# Altium PCB PCB_NodeQuadPCB_2022-04-19.pcbdoc
Units mm, origin at the board's own origin, x right, y up, seen from the top; angles counter-clockwise.
Board outline 99.75 x 100.1 mm, 2 copper layers (Top Layer, Bottom Layer); 20 components, 51 nets, 186 pads, 3 vias.
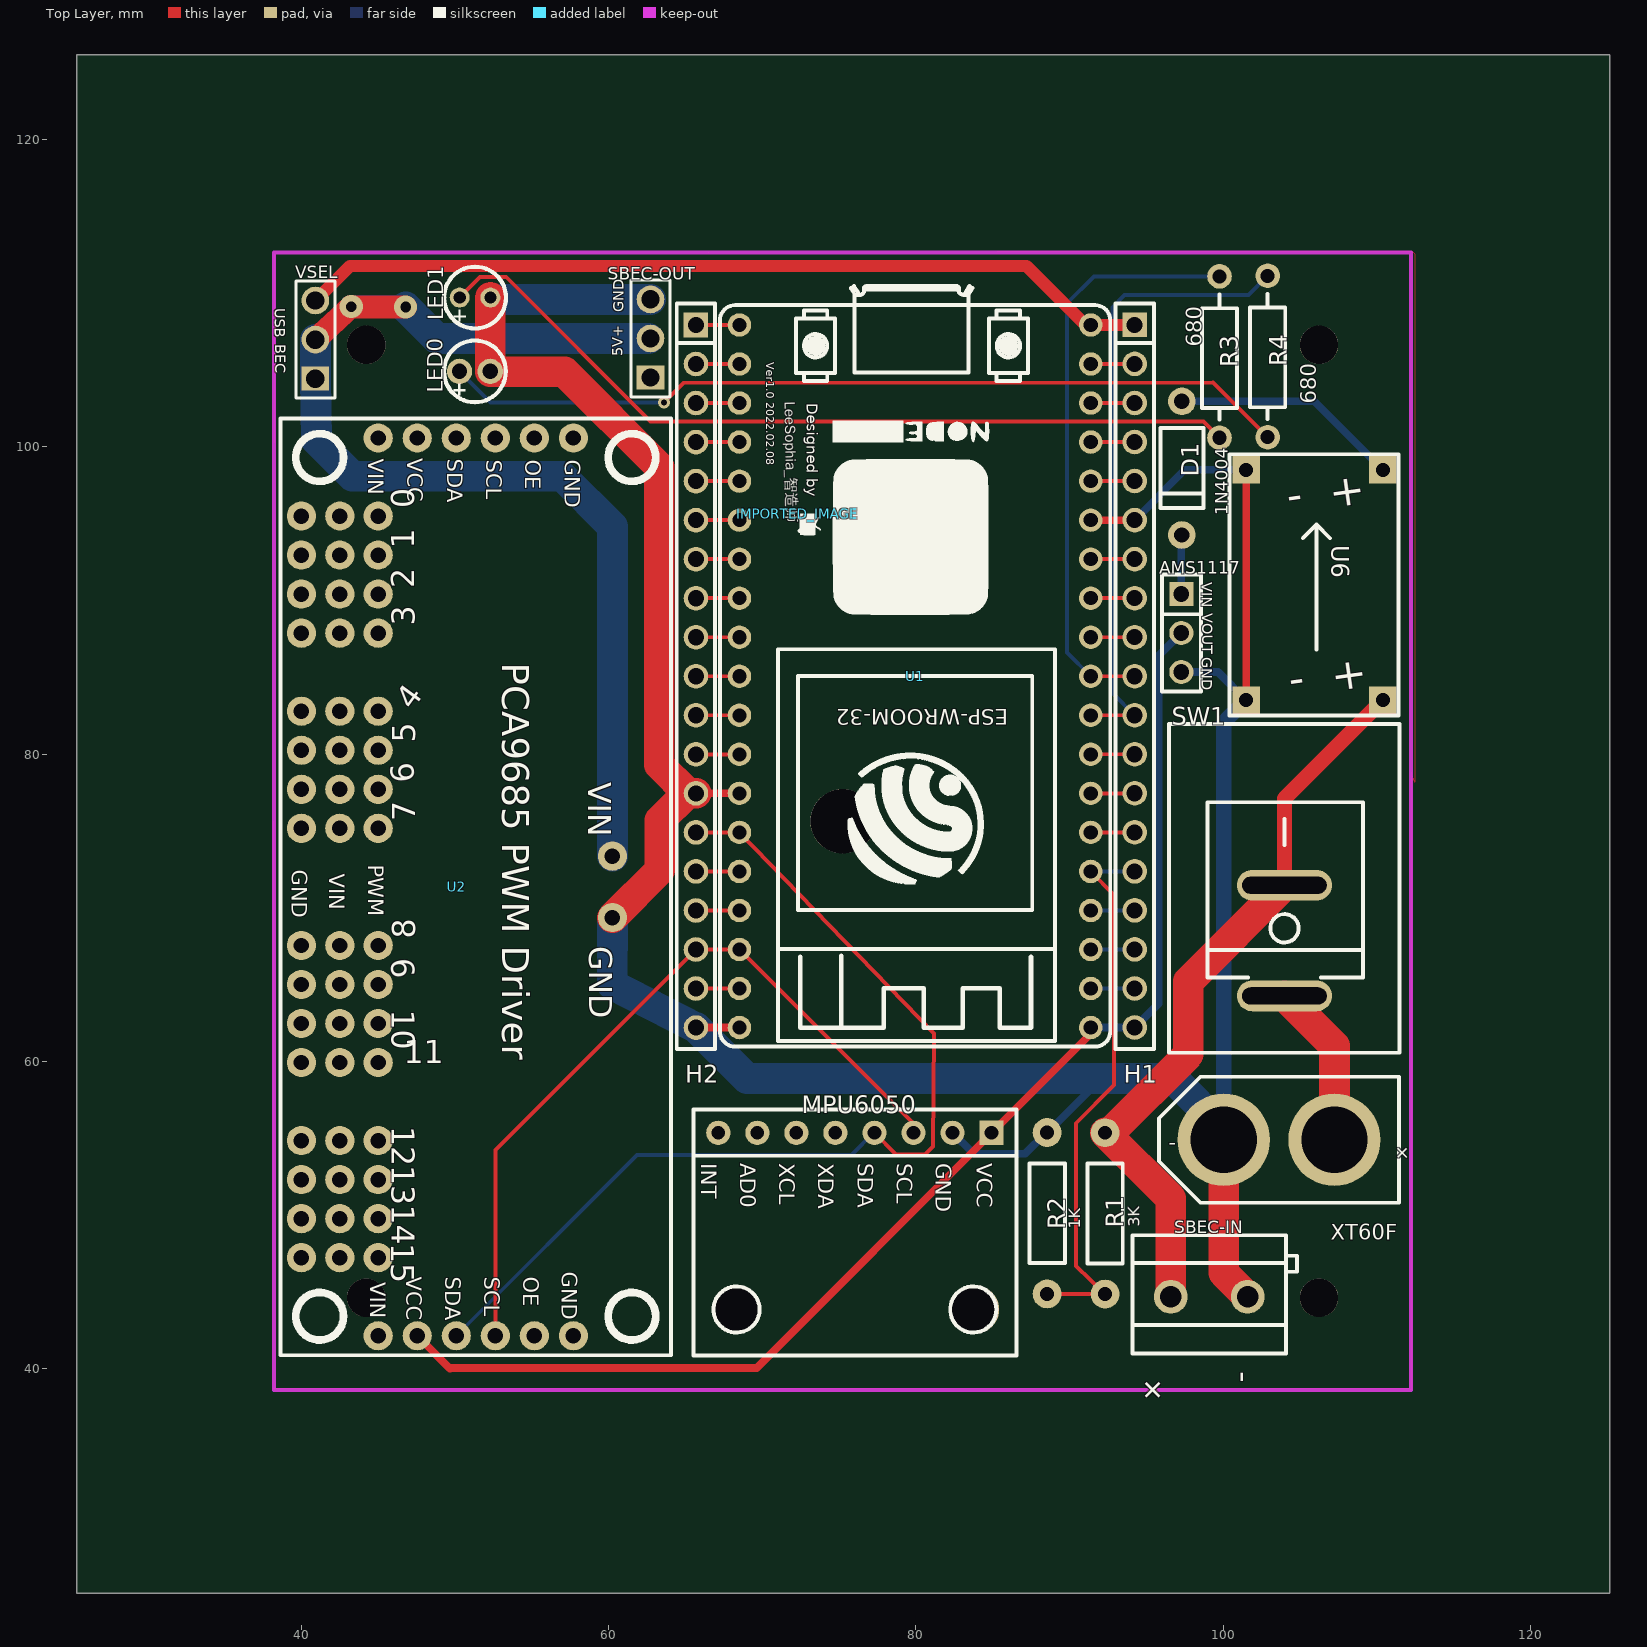
[diagram p0: Top Layer view]
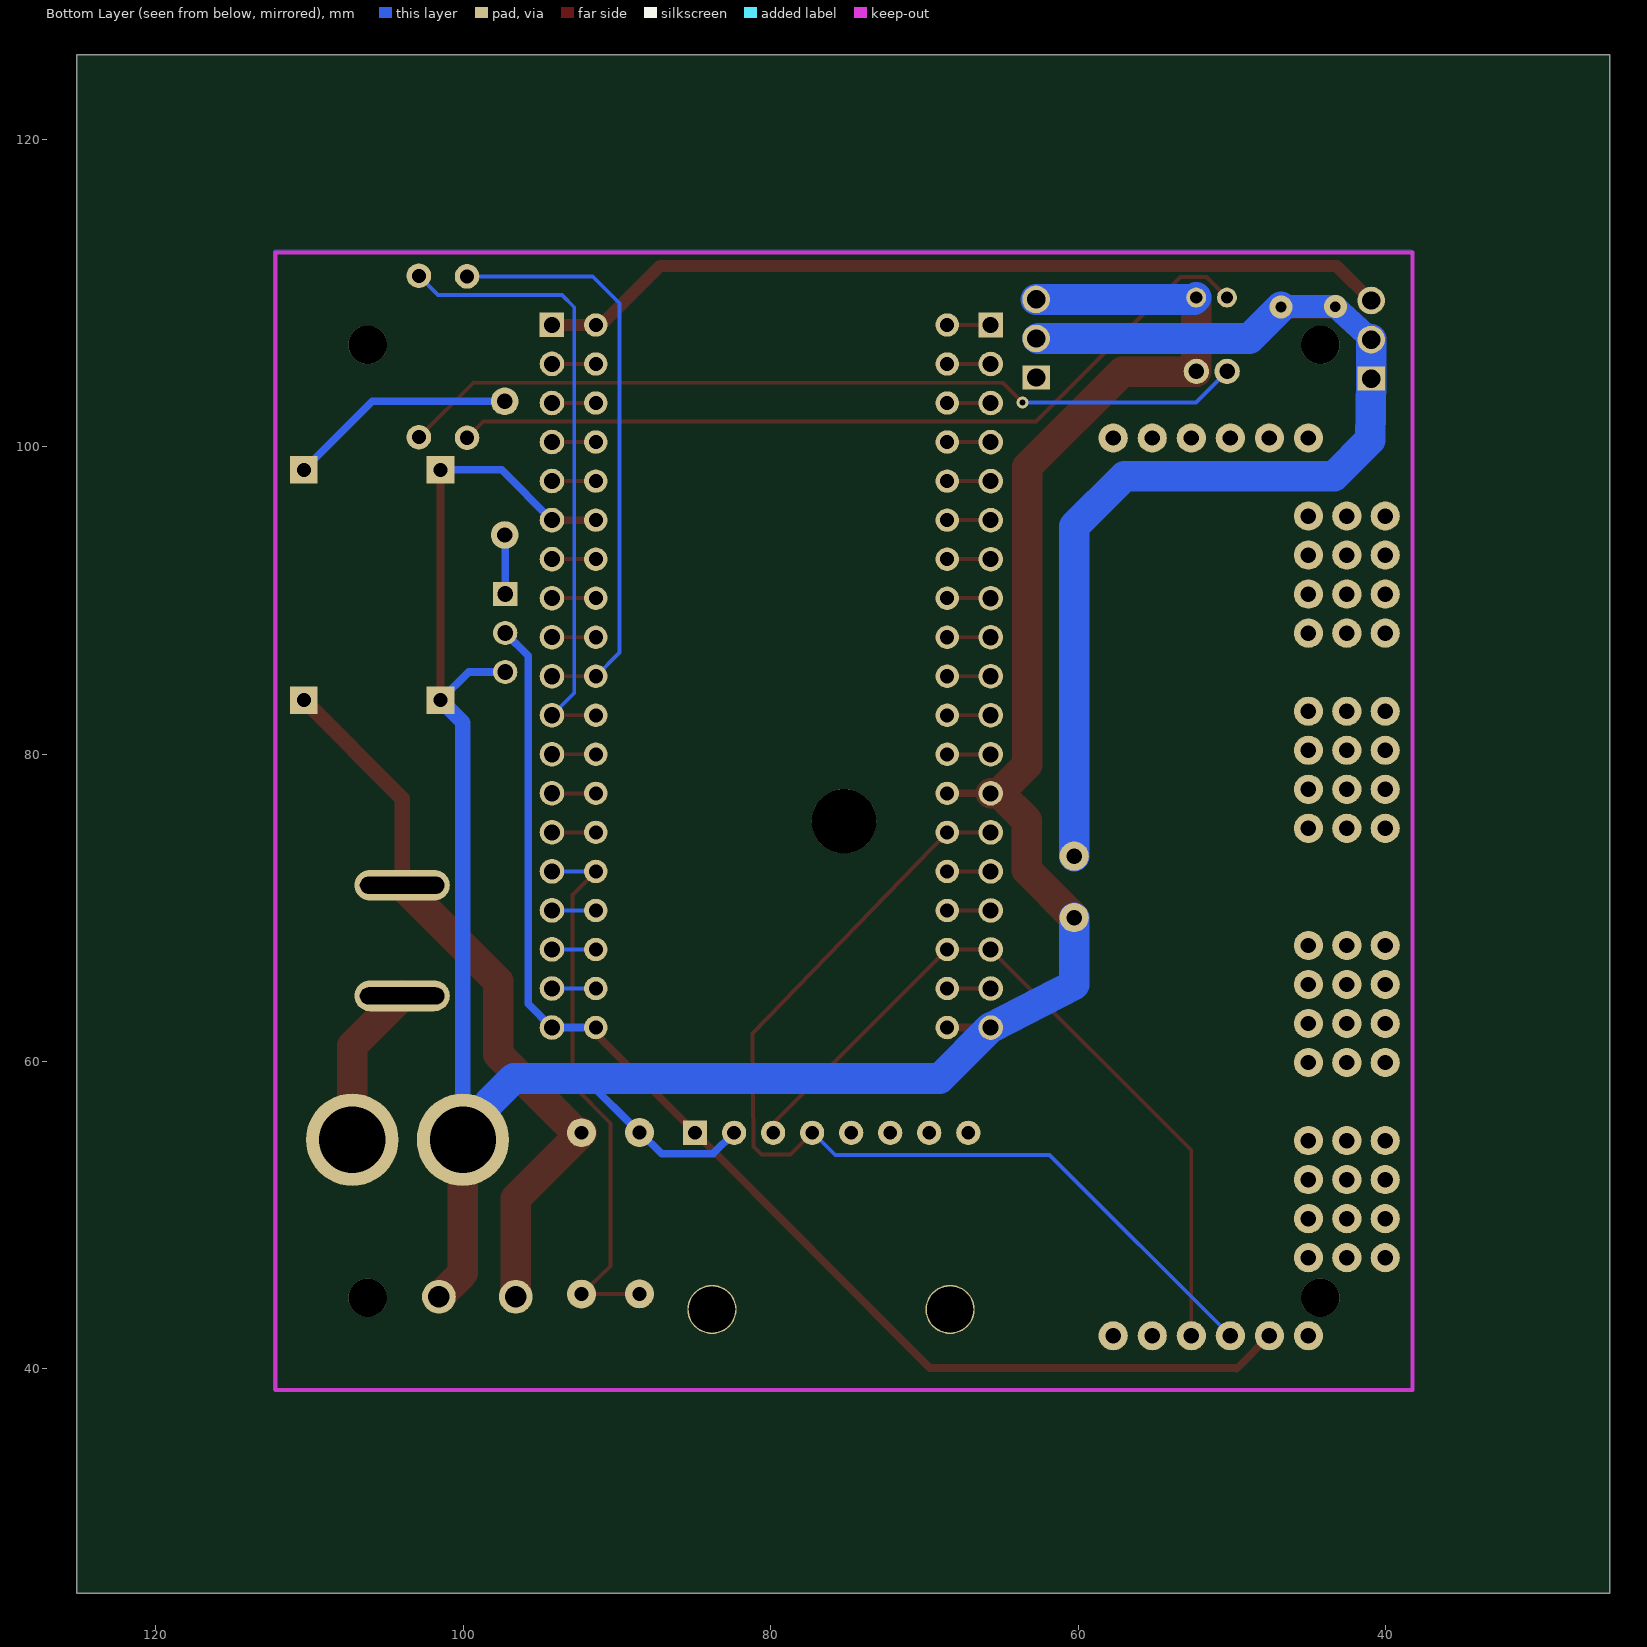
[diagram p1: Bottom Layer view, seen from below]

## Layer stack, top to bottom
Top Layer: signal copper (thickness not stored)
Dielectric: dielectric 0.32, FR-4, Dk 4.8
Bottom Layer: signal copper (thickness not stored)

## Board outline
125.145,25.4 25.4,25.4 25.4,125.497 125.145,125.497

## Components (designator, comment, footprint, x,y, rotation, side; value= is the part's Value field where it differs from the comment)
AMS1117 "Header-Female-2.54_1x3" HDR-TH_3P-P2.54-V-F 97.274,87.878 r270 top
D1 "1N4004_C360241" DO-41_BD2.4-L4.7-P8.70-D0.9-RD 97.304,98.606 r90 top
H1 "2.54-1*19P母" HDR-TH_19P-P2.54-V-F 94.231,85.066 r270 top
H2 "2.54-1*19P母" HDR-TH_19P-P2.54-V-F 65.684,85.062 r270 top
IMPORTED_IMAGE "IMPORTED_IMAGE" IMPORTED_IMAGE 72.316,95.653 r0 top
LED0 "LED-DIP-3MM_RED" LED-TH_BD4.1-P2.00-D0.5-RD_RED 51.299,104.901 r180 top
LED1 "LED-DIP-3MM_GREEN" LED-TH_BD4.1-P2.00-D0.6-RD_GREEN 51.309,109.704 r180 top
MPU6050 "MPU6050模块-排母" MPU6050模块-排母-PCB 75.817,48.048 r270 top
R1 "3kΩ" RES-TH_BD2.3-L6.5-P10.50-D0.5 92.31,50.109 r90 top
R2 "1kΩ" RES-TH_BD2.3-L6.5-P10.50-D0.5 88.537,50.119 r90 top
R3 "680" RES-TH_BD2.2-L6.5-P10.50-D0.6 99.756,105.831 r270 top
R4 "680" RES-TH_BD2.2-L6.5-P10.50-D0.6 102.888,105.871 r270 top
SBEC-IN "KF301-5.0-2P" CONN-TH_P5.00_KF301-5.0-2P 99.085,44.685 r0 top
SBEC-OUT "210S-1*3P L=11.6MMGold-plated black" HDR-TH_3P-P2.54-V-M-1 62.728,107.042 r90 top
SW1 "CN-KCD1-101-2P" SW-TH_CN-KCD3-2P 103.979,67.863 r90 top
U1 "Ai-Thinker_NodeMCU-32SLUA" AI-THINKER_NODEMCU-32SLUA 79.945,85.062 r180 top
U2 "PCA9685自改16路舵机 COPY" PCA9685 50.088,72.626 r270 top
U6 "MINI360 DCDC" MINI360 111.394,99.507 r270 top
VSEL "210S-1*3P L=11.6MMGold-plated black" HDR-TH_3P-P2.54-V-M-1 40.921,106.972 r90 top
XT60F "XT60-F" XT60PB-F 103.629,54.903 r90 top

## Footprints (in the part's own frame and the unit in brackets; to place one, negate y for a bottom-side part, rotate by r counter-clockwise, add the part's x,y. Pads: shape width x height; smd on the part's side, far side on the other; paste and mask are expansions set on the pad)
AI-THINKER_NODEMCU-32SLUA [mil]
  round 60 hole 36: 1(-450,-900) 2(-450,-800) 3(-450,-700) 4(-450,-600) 5(-450,-500) 6(-450,-400) 7(-450,-300) 8(-450,-200) 9(-450,-100) 10(-450,0) 11(-450,100) 12(-450,200) 13(-450,300) 14(-450,400) 15(-450,500) 16(-450,600) 17(-450,700) 18(-450,800) 19(-450,900) 20(450,-900) 21(450,-800) 22(450,-700) 23(450,-600) 24(450,-500) 25(450,-400) 26(450,-300) 27(450,-200) 28(450,-100) 29(450,0) 30(450,100) 31(450,200) 32(450,300) 33(450,400) 34(450,500) 35(450,600) 36(450,700) 37(450,800) 38(450,900)
  silkscreen extent -500,-999 500,949
CONN-TH_P5.00_KF301-5.0-2P [mm]
  round 2.2 hole 1.4: 1(-2.5,0) 2(2.5,0)
  silkscreen extent -5,-3.7 5.71,4
DO-41_BD2.4-L4.7-P8.70-D0.9-RD [mm]
  round 1.8 hole 1: 1(-4.35,0) 2(4.35,0)
  silkscreen extent -2.6,-1.4 2.6,1.4
HDR-TH_3P-P2.54-V-F [mil]
  rect 62x62 hole 40.16: 1(-100,0)
  round 62 hole 40.16: 2(0,0) 3(100,0)
  silkscreen extent -150,-50 150,50
HDR-TH_3P-P2.54-V-M-1 [mm]
  rect 1.575x1.8 hole 1.2: 1(-2.54,0)
  round 1.8 hole 1.2: 2(0,0) 3(2.54,0)
  silkscreen extent -3.81,-1.27 3.81,1.27
HDR-TH_19P-P2.54-V-F [mm]
  rect 1.6x1.6 hole 1.05: 1(-22.86,0)
  round 1.6 hole 1.05: 2(-20.32,0) 3(-17.78,0) 4(-15.24,0) 5(-12.7,0) 6(-10.16,0) 7(-7.62,0) 8(-5.08,0) 9(-2.54,0) 10(0,0) 11(2.54,0) 12(5.08,0) 13(7.62,0) 14(10.16,0) 15(12.7,0) 16(15.24,0) 17(17.78,0) 18(20.32,0) 19(22.86,0)
  silkscreen extent -24.25,-1.25 24.25,1.25
IMPORTED_IMAGE [mm]
  silkscreen extent 0,-1.4 1.5,0
LED-TH_BD4.1-P2.00-D0.5-RD_RED [mm]
  round 1.65 hole 1: 1(-1,0) 2(1,0)
  silkscreen extent -2.05,-2.05 2.05,2.05
LED-TH_BD4.1-P2.00-D0.6-RD_GREEN [mm]
  round 1.3 hole 0.8: 1(-1,0) 2(1,0)
  silkscreen extent -2.05,-2.05 2.05,2.05
MINI360 [mil]
  rect 70.87x70.87 hole 36: 1(40,-40) 2(40,-390) 3(630,-40) 4(630,-390)
  silkscreen extent 0,-433 669,0
MPU6050模块-排母-PCB [mil]
  round 125.98 hole 118.11 slot 118.31 at 90 deg: 0(165,315)
  round 125.98 hole 118.11 slot 118.31 at 0 deg: 0(165,-295)
  rect 62x62 hole 35: 1(-287.76,358.36)
  round 62 hole 35: 2(-287.76,258.36) 3(-287.76,158.36) 4(-287.76,58.36) 5(-287.76,-41.64) 6(-287.76,-141.64) 7(-287.76,-241.64) 8(-287.76,-341.64)
  silkscreen extent -347,-405 283,422
PCA9685 [mm]
  round 1.9 hole 1: 1(-22.86,-7.58) 1(-20.32,-7.58) 1(-17.78,-7.58) 1(-15.24,-7.58) 1(-10.16,-7.58) 1(-7.62,-7.58) 1(-5.08,-7.58) 1(-2.54,-7.58) 1(5.08,-7.58) 1(7.62,-7.58) 1(10.16,-7.58) 1(12.7,-7.58) 1(17.78,-7.58) 1(20.32,-7.58) 1(22.86,-7.58) 1(25.4,-7.58) GND(-22.86,-10.08) GND(-20.32,-10.08) GND(-17.78,-10.08) GND(-15.24,-10.08) GND(-10.16,-10.08) GND(-7.62,-10.08) GND(-5.08,-10.08) GND(-2.54,-10.08) GND(5.08,-10.08) GND(7.62,-10.08) GND(10.16,-10.08) GND(12.7,-10.08) GND(17.78,-10.08) GND(20.32,-10.08) GND(22.86,-10.08) GND(25.4,-10.08) GND-IN(-27.94,7.62) GND-OUT(30.48,7.62) GND-TOT(3.27,10.16) OE-IN(-27.94,5.08) OE-OUT(30.48,5.08) PWM01(-22.86,-5.08) PWM02(-20.32,-5.08) PWM03(-17.78,-5.08) PWM04(-15.24,-5.08) PWM05(-10.16,-5.08) PWM06(-7.62,-5.08) PWM07(-5.08,-5.08) PWM08(-2.54,-5.08) PWM09(5.08,-5.08) PWM10(7.62,-5.08) PWM11(10.16,-5.08) PWM12(12.7,-5.08) PWM13(17.78,-5.08) PWM14(20.32,-5.08) PWM15(22.86,-5.08) PWM16(25.4,-5.08) SCL-IN(-27.94,2.54) SCL-OUT(30.48,2.54) SDA-IN(-27.94,0) SDA-OUT(30.48,0) VCC-IN(-27.94,-2.54) VCC-OUT(30.48,-2.54) VIN-IN(-27.94,-5.08) VIN-OUT(30.48,-5.08) VIN-TOT(-0.73,10.16)
  silkscreen extent -29.21,-11.43 31.75,13.97
RES-TH_BD2.2-L6.5-P10.50-D0.6 [mm]
  round 1.6 hole 0.914: 1(-5.25,0) 2(5.25,0)
  silkscreen extent -4.06,-1.14 4.06,1.14
RES-TH_BD2.3-L6.5-P10.50-D0.5 [mil]
  round 74 hole 35.4: 1(-206.69,0) 2(206.69,0)
  silkscreen extent -128,-45 128,45
SW-TH_CN-KCD3-2P [mm]
  oval 2x6.2 hole 1.1 slot 5.5 at 90 deg: 1(-3.6,0) 2(3.6,0)
  silkscreen extent -7.3,-7.5 14.1,7.5
XT60PB-F [mm]
  round 6 hole 4.3: 1(0,3.6) 2(0,-3.6)
  silkscreen extent -4.1,-7.8 4.1,7.8

## Free pads (board coordinates)
  round 2.5 hole 2.5 unplated: ""(44.227,44.629) ""(44.227,106.628) ""(106.227,44.629) ""(106.227,106.628)
  round 4.2 hole 4.2 unplated: ""(75.227,75.628)

## Via types
v1: diameter 1.5, hole 0.7, Top Layer to Bottom Layer, tented both sides, 2 vias
v2: diameter 0.8, hole 0.4, Top Layer to Bottom Layer, tented both sides, 1 vias

## Nets (pads, with @x,y where several pads share a name; then routed paths per layer and width w, separated by ;. In a path a pad name is that pad's centre, name@x,y a point inside that pad or via, vN(x,y) a via of type N, cw(c..) or ccw(c..) an arc to the next point about the centre after c; other vN are vias at no path point)
AMS-VOUT: AMS1117.2 H1.19 MPU6050.1 U1.19 U2.VCC-OUT | length 83.9
  Top Layer w0.5: U2.VCC-OUT 49.682,40.013 49.723,40.051 69.634,40.051 MPU6050.1 91.375,61.812 U1.19
  Bottom Layer w0.5: U1.19 H1.19 ; H1.19 95.783,63.757 95.783,86.387 AMS1117.2
D1_1: AMS1117.1 D1.1 | length 3.9
  Bottom Layer w0.5: AMS1117.1 97.274,94.226 D1.1
D1_2: D1.2 U6.1 | length 14.9
  Bottom Layer w0.5: D1.2 105.913,102.956 U6.1
GND: AMS1117.3 H1.6 H2.13 H2.19 LED0.1 LED1.1 MPU6050.2 R2.2 SBEC-IN.2 SBEC-OUT.3 U1.6 U1.32 U1.38 U2.GND-TOT U6.2 U6.4 XT60F.1 | length 199.2
  Top Layer w0.5: H2.19 U1.38 ; H2.13 U1.32 ; U1.6 H1.6 ; U6.4 U6.2
  Top Layer w2: LED0.1 52.299,109.694 LED1.1 ; LED0.1@52.298,104.902 52.329,104.871 57.124,104.871 63.299,98.697 63.299,79.301 65.158,77.442 H2.13 65.091,77.442 63.328,75.678 63.328,72.436 U2.GND-TOT ; XT60F.1@100.029,55.483 100.029,46.241 SBEC-IN.2
  Bottom Layer w0.5: MPU6050.2 83.754,53.982 87.096,53.982 88.483,55.369 R2.2 92.055,58.885 ; H1.6 97.496,98.491 U6.2 ; AMS1117.3 99.655,85.338 U6.4
  Bottom Layer w1: XT60F.1@100.029,55.483 100.029,82.045 U6.4
  Bottom Layer w2: LED1.1 52.431,109.582 SBEC-OUT.3 ; U2.GND-TOT 60.246,65 H2.19 69,58.886 96.723,58.886 100.029,55.58 XT60F.1@100.029,55.483
R3_2: LED1.2 R3.2 | length 54.3
  Top Layer w0.254: LED1.2 51.641,111.036 53.34,111.036 62.738,101.638 98.699,101.638 R3.2
R4_2: LED0.2 R4.2 | length 55.4
  Top Layer w0.254: v2(63.609,102.88) 64.879,104.15 99.319,104.191 R4.2
  Bottom Layer w0.254: LED0.2 52.32,102.88 v2(63.609,102.88)
S$7: 
S$9: 
S$11: 
S$13: 
S$62: 
S$64: 
S$140: 
S$142: 
SBEC-IN_1: R1.2 SBEC-IN.1 SW1.2 U6.3 | length 48.3
  Top Layer w1: SW1.2 103.979,77.105 U6.3
  Top Layer w2: SBEC-IN.1 96.585,51.084 92.31,55.359 92.626,55.359 97.724,60.457 97.724,65.208 SW1.2
U1_1: H1.1 U1.1 VSEL.3 | length 55.8
  Top Layer w0.8: VSEL.3 43.175,111.765 87.195,111.765 91.041,107.922 U1.1 H1.1
U1_2: H1.2 U1.2 | length 2.9
  Top Layer w0.254: U1.2 H1.2
U1_3: H1.3 U1.3 | length 2.9
  Top Layer w0.254: U1.3 H1.3
U1_4: H1.4 U1.4 | length 2.9
  Top Layer w0.254: U1.4 H1.4
U1_5: H1.5 U1.5 | length 2.9
  Top Layer w0.254: U1.5 H1.5
U1_7: H1.7 U1.7 | length 2.9
  Top Layer w0.254: U1.7 H1.7
U1_8: H1.8 U1.8 | length 2.9
  Top Layer w0.254: U1.8 H1.8
U1_9: H1.9 U1.9 | length 2.9
  Top Layer w0.254: U1.9 H1.9
U1_10: H1.10 R3.1 U1.10 | length 38.4
  Top Layer w0.254: U1.10 H1.10
  Bottom Layer w0.254: U1.10 89.827,86.609 89.827,109.334 91.574,111.082 R3.1
U1_11: H1.11 R4.1 U1.11 | length 41
  Top Layer w0.254: U1.11 H1.11
  Bottom Layer w0.254: H1.11 92.78,83.977 92.78,109.074 93.581,109.874 101.641,109.874 R4.1
U1_12: H1.12 U1.12 | length 2.9
  Top Layer w0.254: U1.12 H1.12
U1_13: H1.13 U1.13 | length 2.9
  Top Layer w0.254: U1.13 H1.13
U1_14: H1.14 U1.14 | length 2.9
  Top Layer w0.254: U1.14 H1.14
U1_15: H1.15 R1.1 R2.1 U1.15 | length 36.4
  Top Layer w0.254: R2.1@88.768,44.869 R1.1 90.409,46.696 90.409,55.974 92.9,58.466 92.9,70.835 U1.15
  Bottom Layer w0.254: U1.15 H1.15
U1_16: H1.16 U1.16 | length 2.9
  Bottom Layer w0.254: U1.16 H1.16
U1_17: H1.17 U1.17 | length 2.9
  Bottom Layer w0.254: U1.17 H1.17
U1_18: H1.18 U1.18 | length 2.9
  Bottom Layer w0.254: U1.18 H1.18
U1_20: H2.1 U1.20 | length 2.8
  Top Layer w0.254: H2.1 U1.20
U1_21: H2.2 U1.21 | length 2.8
  Top Layer w0.254: H2.2 U1.21
U1_22: H2.3 U1.22 | length 2.8
  Top Layer w0.254: H2.3 U1.22
U1_23: H2.4 U1.23 | length 2.8
  Top Layer w0.254: H2.4 U1.23
U1_24: H2.5 U1.24 | length 2.8
  Top Layer w0.254: H2.5 U1.24
U1_25: H2.6 U1.25 | length 2.8
  Top Layer w0.254: H2.6 U1.25
U1_26: H2.7 U1.26 | length 2.8
  Top Layer w0.254: H2.7 U1.26
U1_27: H2.8 U1.27 | length 2.8
  Top Layer w0.254: H2.8 U1.27
U1_28: H2.9 U1.28 | length 2.8
  Top Layer w0.254: H2.9 U1.28
U1_29: H2.10 U1.29 | length 2.8
  Top Layer w0.254: H2.10 U1.29
U1_30: H2.11 U1.30 | length 2.8
  Top Layer w0.254: H2.11 U1.30
U1_31: H2.12 U1.31 | length 2.8
  Top Layer w0.254: H2.12 U1.31
U1_33: H2.14 MPU6050.4 U1.33 U2.SDA-OUT | length 65.7
  Top Layer w0.254: H2.14 U1.33 ; U1.33 81.172,61.808 81.122,54.473 80.602,53.952 78.704,53.952 MPU6050.4
  Bottom Layer w0.254: U2.SDA-OUT 61.854,53.912 75.797,53.912 77.242,55.357 MPU6050.4
U1_34: H2.15 U1.34 | length 2.8
  Top Layer w0.254: H2.15 U1.34
U1_35: H2.16 U1.35 | length 2.8
  Top Layer w0.254: H2.16 U1.35
U1_36: H2.17 MPU6050.3 U1.36 U2.SCL-OUT | length 50
  Top Layer w0.254: U2.SCL-OUT 52.628,54.226 H2.17 U1.36 79.84,55.957 MPU6050.3
U1_37: H2.18 U1.37 | length 2.8
  Top Layer w0.254: H2.18 U1.37
U2_VIN-TOT: SBEC-OUT.2 U2.VIN-TOT VSEL.1 VSEL.2 | length 79.6
  Top Layer w1.5: VSEL.2 v1(43.253,109.114) ; v1(43.253,109.114) 43.283,109.084 v1(46.796,109.084)
  Bottom Layer w1.5: VSEL.2 v1(43.253,109.114) v1@46.766,109.113
  Bottom Layer w2: VSEL.1 VSEL.2 ; VSEL.1 40.99,100.426 43.342,98.074 56.982,98.074 60.249,94.811 U2.VIN-TOT ; v1(46.796,109.084) 48.836,107.043 SBEC-OUT.2@62.598,107.043
XT60F_2: SW1.1 XT60F.2 | length 10.1
  Top Layer w2: SW1.1 107.229,61.013 XT60F.2@107.229,55.483
pads on no net: MPU6050.0 MPU6050.5 MPU6050.6 MPU6050.7 MPU6050.8 SBEC-OUT.1 U2.1 U2.GND U2.GND-IN U2.GND-OUT U2.OE-IN U2.OE-OUT U2.PWM01 U2.PWM02 U2.PWM03 U2.PWM04 U2.PWM05 U2.PWM06 U2.PWM07 U2.PWM08 U2.PWM09 U2.PWM10 U2.PWM11 U2.PWM12 U2.PWM13 U2.PWM14 U2.PWM15 U2.PWM16 U2.SCL-IN U2.SDA-IN U2.VCC-IN U2.VIN-IN U2.VIN-OUT

## Polygon pours and split planes (outlines as drawn)
GND on Bottom Layer (solid): 38.239,112.707 38.329,112.797 112.275,112.797 112.375,112.697 112.375,38.67 38.239,38.67
GND on Top Layer (solid): 38.279,112.567 85.275,112.727 112.275,112.727 112.445,112.556 112.445,78.17 112.215,78.821 112.215,38.62 112.135,38.7 38.189,38.7

## Silkscreen, mask and mechanical layers (free items; w line width, h text height)
Top Overlay:
  text "USB" at 38.279,109.024 h0.7 r270
  text "GND" at 60.996,108.754 h0.7 r90
  text "BEC" at 38.309,106.652 h0.7 r270
  text "680" at 98.584,106.492 h1 r90
  text "5V+" at 60.916,105.871 h0.7 r90
  text "LeeSophia_智造师" at 71.209,102.916 h1.2 r271
  text "Designed by" at 72.63,102.827 h1.2 r270
  text "680" at 106.04,102.799 h1 r90
  text "1N4004" at 100.306,95.534 h0.8 r90
  text "1" at 47.355,93.362 h1.5 r90
  text "VIN" at 98.585,91.18 h0.7 r270
  text "2" at 47.355,90.79 h1.5 r90
  text "VOUT" at 98.615,89.159 h0.7 r270
  text "3" at 47.385,88.348 h1.5 r90
  text "GND" at 98.585,86.296 h0.7 r270
  text "4" at 47.212,82.793 h1.5 r54
  text "5" at 47.415,80.732 h1.5 r90
  text "6" at 47.393,78.196 h1.5 r95
  text "7" at 47.415,75.628 h1.5 r90
  text "8" at 47.405,67.973 h1.5 r90
  text "9" at 47.402,65.466 h1.5 r95
  text "10" at 45.905,63.359 h1.5 r270
  text "11" at 46.655,59.867 h1.5
  text "12" at 45.905,55.793 h1.5 r270
  text "13" at 45.905,53.231 h1.5 r270
  text "14" at 45.905,50.659 h1.5 r270
  text "3K" at 94.812,49.228 h1.3 r91
  text "1K" at 90.959,49.108 h1.3 r90
  text "+" at 95.572,39.691 h1.5 r225
  text "-" at 101.797,39.101 h1.5 r90

## Text inside footprints (layer, text, board x,y; h text height)
MPU6050: Top Overlay "VCC" at 83.946,53.382 h1.02 r270; Top Overlay "GND" at 81.279,53.382 h1.02 r270; Top Overlay "SCL" at 78.739,53.382 h1.02 r270; Top Overlay "SDA" at 76.199,53.382 h1.02 r270; Top Overlay "XDA" at 73.659,53.382 h1.02 r270; Top Overlay "XCL" at 71.119,53.382 h1.02 r270; Top Overlay "AD0" at 68.579,53.382 h1.02 r270; Top Overlay "INT" at 66.039,53.382 h1.02 r270
U1: Top Overlay "ESP-WROOM-32" at 85.99,82.928 h1.02 r180; Top Overlay "Ver1.0 2022.02.08" at 70.072,105.504 h0.9 r270
U2: Top Overlay "GND" at 39.397,72.465 h1 r270; Top Overlay "VIN" at 41.81,72.211 h1 r270; Top Overlay "PWM" at 44.35,72.782 h1 r270; Top Overlay "15" at 45.855,48.158 h1.5 r270; Top Overlay "0" at 47.355,96.004 h1.5 r90; Top Overlay "GND" at 56.967,46.315 h1 r270; Top Overlay "VCC" at 46.824,45.998 h1 r270; Top Overlay "OE" at 54.439,45.999 h1 r270; Top Overlay "SCL" at 51.911,45.999 h1 r270; Top Overlay "SDA" at 49.383,45.999 h1 r270; Top Overlay "VCC" at 46.886,99.246 h1 r270; Top Overlay "SDA" at 49.508,99.206 h1 r270; Top Overlay "SCL" at 52.03,99.156 h1 r270; Top Overlay "OE" at 54.592,99.156 h1 r270; Top Overlay "GND" at 57.144,99.136 h1 r270; Top Overlay "VIN" at 58.675,78.18 h1.5 r270; Top Overlay "GND" at 58.735,67.492 h1.5 r270; Top Overlay "PCA9685 PWM Driver" at 52.5,85.956 h3 r270; Top Overlay "VIN" at 44.374,99.216 h1 r270; Top Overlay "VIN" at 44.506,45.633 h1 r270
U6: Top Overlay "+  -" at 109.094,98.031 h2.03 r188; Top Overlay "+  -" at 109.221,86.093 h2.03 r188
XT60F: Top Overlay "-" at 96.929,55.003 h1 r180; Top Overlay "+" at 110.975,54.149 h1 r315